# EAGLE board laserprojector (EAGLE 5.10)
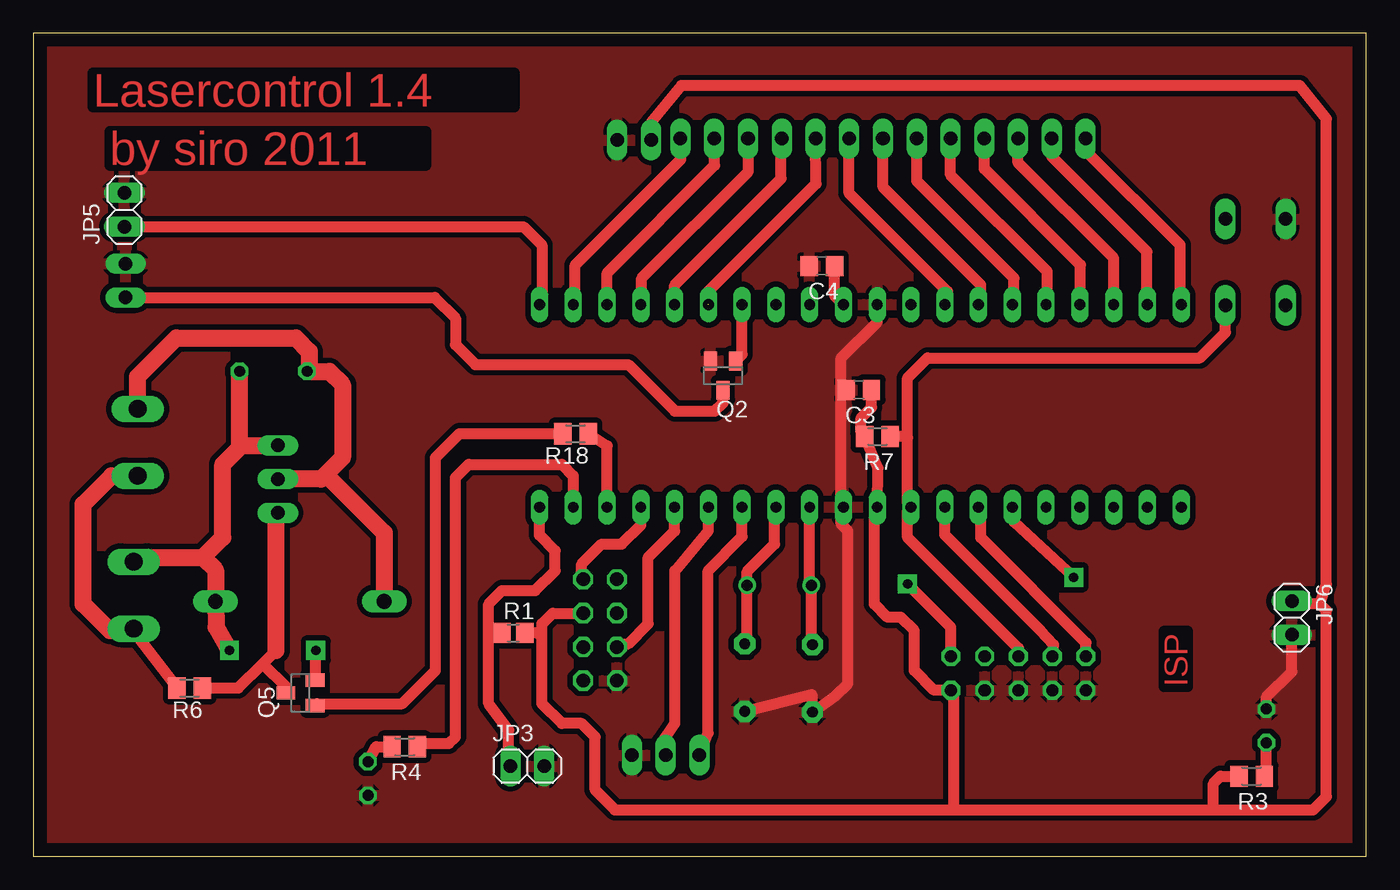
[diagram p0: board, top side]
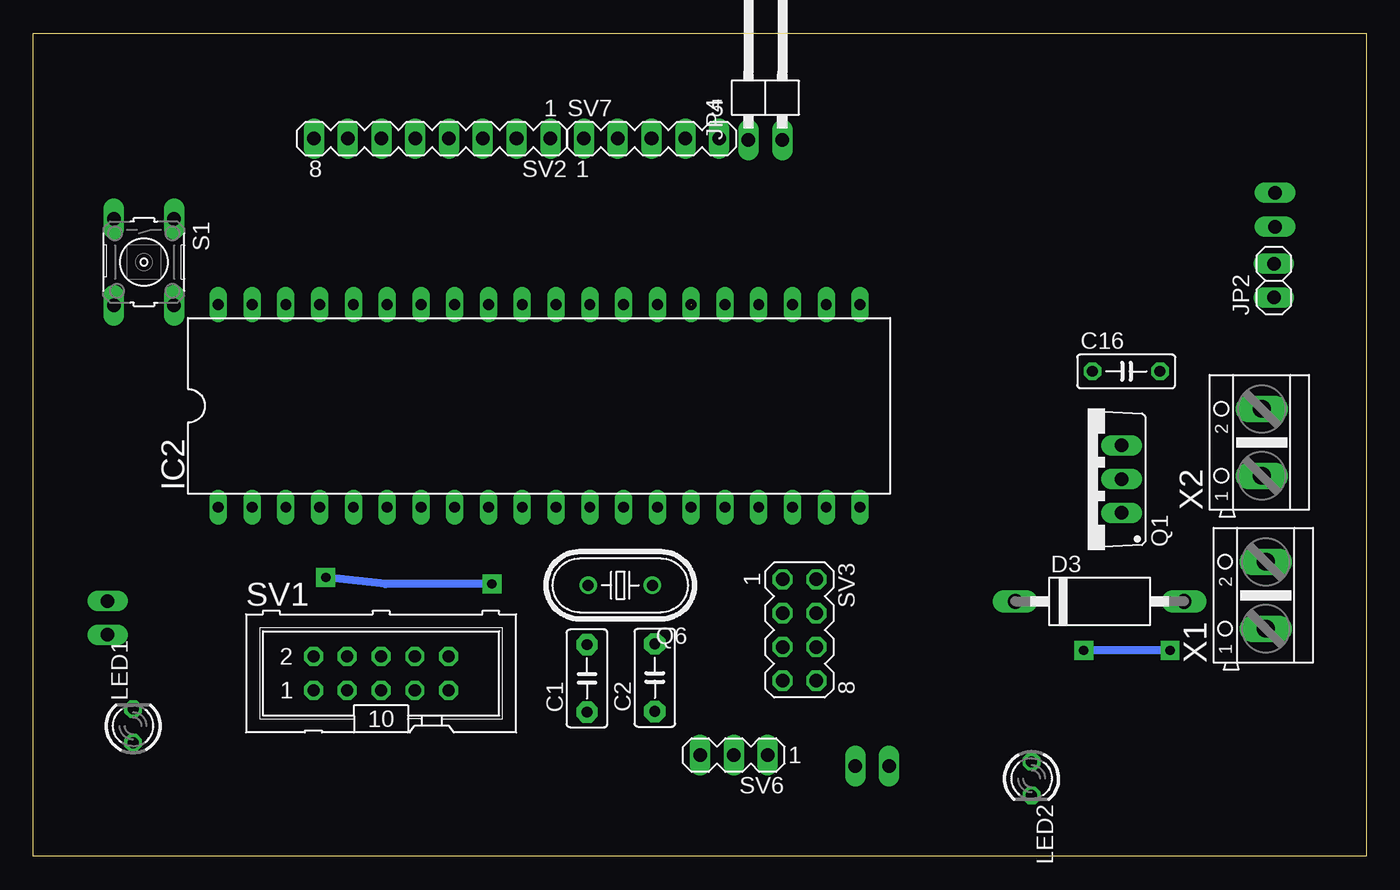
[diagram p1: board, bottom side, seen from below]

Size 100.25 x 61.93 mm. Coordinates in mm from the lower left corner, seen from the top.
Outline: 0,0 100.25,0 100.25,61.93 0,61.93 0,0
Copper layers (1*16): Top 0.035mm / dielectric 1.5mm / Bottom 0.035mm
Design rules "default *": minimum track width 10mil, minimum drill 24mil, track to track 8mil, track to pad 8mil, pad to pad 8mil, via to via 8mil, smd to smd 8mil, copper to edge 40mil, drill to drill 8mil, minimum pad ring 10mil, minimum via ring 8mil, stop-mask expansion 4mil, vias tented up to drill 0mil, thermal gap 10mil
Net classes: 0 default: clearance 0.254 mm

## Footprints (pad centres in the part's own frame; a part is rotated, then mirrored left to right if it is on the bottom)
C5B3 = drill 0.813 pad 1.6 octagon: 1 -2.54,0; 2 2.54,0
C0805 = smd 1.3 x 1.5: 1 -0.95,0; 2 0.95,0
C050-025X075 = drill 0.813 octagon: 1 -2.54,0; 2 2.54,0
DO15-12 = drill 1.118 long: A 6.35,0; C -6.35,0
DIL40 = drill 0.813 long: 1 -24.13,-7.62; 2 -21.59,-7.62; 3 -19.05,-7.62; 4 -16.51,-7.62; 5 -13.97,-7.62; 6 -11.43,-7.62; 7 -8.89,-7.62; 8 -6.35,-7.62; 9 -3.81,-7.62; 10 -1.27,-7.62; 11 1.27,-7.62; 12 3.81,-7.62; 13 6.35,-7.62; 14 8.89,-7.62; 15 11.43,-7.62; 16 13.97,-7.62; 17 16.51,-7.62; 18 19.05,-7.62; 19 21.59,-7.62; 20 24.13,-7.62; 21 24.13,7.62; 22 21.59,7.62; 23 19.05,7.62; 24 16.51,7.62; 25 13.97,7.62; 26 11.43,7.62; 27 8.89,7.62; 28 6.35,7.62; 29 3.81,7.62; 30 1.27,7.62; 31 -1.27,7.62; 32 -3.81,7.62; 33 -6.35,7.62; 34 -8.89,7.62; 35 -11.43,7.62; 36 -13.97,7.62; 37 -16.51,7.62; 38 -19.05,7.62; 39 -21.59,7.62; 40 -24.13,7.62
1X02 = drill 1.016 long: 1 -1.27,0; 2 1.27,0
1X02/90 = drill 1.016 long: 1 -1.27,-3.81; 2 1.27,-3.81
LED3MM = drill 0.813 octagon: A -1.27,0; K 1.27,0
TO220BV = drill 1.016 long: D 0,-2.54; G -2.54,-2.54; S 2.54,-2.54
SOT23 = smd 1 x 1.4: 1 -0.95,-1.1; 2 0.95,-1.1; 3 0,1.1
HC49U70 = drill 0.813 round: 1 -2.413,0; 2 2.413,0
R0805 = smd 1.3 x 1.5: 1 -0.85,0; 2 0.85,0
M0805 = smd 1.3 x 1.6: 1 -0.95,0; 2 0.95,0
B3F-10XX = drill 1.016 long: 1 -3.251,2.261; 2 3.251,2.261; 3 -3.251,-2.261; 4 3.251,-2.261
ML10 = drill 0.914 octagon: 1 -5.08,-1.27; 2 -5.08,1.27; 3 -2.54,-1.27; 4 -2.54,1.27; 5 0,-1.27; 6 0,1.27; 7 2.54,-1.27; 8 2.54,1.27; 9 5.08,-1.27; 10 5.08,1.27
MA08-1 = drill 1.016 long: 1 -8.89,0; 2 -6.35,0; 3 -3.81,0; 4 -1.27,0; 5 1.27,0; 6 3.81,0; 7 6.35,0; 8 8.89,0
MA04-2 = drill 1.016 octagon: 1 -3.81,-1.27; 2 -3.81,1.27; 3 -1.27,-1.27; 4 -1.27,1.27; 5 1.27,-1.27; 6 1.27,1.27; 7 3.81,-1.27; 8 3.81,1.27
MA03-1 = drill 1.016 long: 1 -2.54,0; 2 0,0; 3 2.54,0
MA05-1 = drill 1.016 long: 1 -5.08,0; 2 -2.54,0; 3 0,0; 4 2.54,0; 5 5.08,0
AK500/2 = drill 1.321 long: 1 -2.515,0; 2 2.515,0

## Placement (x,y rotation side)
C1  22n  [C5B3]  58.6,13.4 90 bottom
C2  22n  [C5B3]  53.5,13.45 90 bottom
C3  100n  [C0805]  62.1,35.1 180 top
C4  100n  [C0805]  59.32,44.42 180 top
C16  100n  [C050-025X075]  18.05,36.5 0 bottom
D3  1N5060GP  [DO15-12]  20.05,19.19 0 bottom
IC2  ATMEGA32L  [DIL40]  62.2,33.9 0 bottom
JP2  to lasercontrol  [1X02]  6.95,43.33 90 bottom
JP3  POWERON BUTTON  [1X02]  37.15,6.8 0 top
JP4  LCD Power  [1X02/90]  45.19,57.71 0 bottom
JP5  [1X02]  6.85,48.65 90 top
JP6  [1X02]  94.65,17.95 270 top
LED1  Status  [LED3MM]  92.74,9.83 90 bottom
LED2  Blink  [LED3MM]  25.17,5.86 270 bottom
Q1  BUZ11BV  [TO220BV]  20.93,28.38 90 bottom
Q2  BSS123  [SOT23]  51.88,36.17 180 top
Q5  BSS123  [SOT23]  20.1,12.31 90 top
Q6  8M  [HC49U70]  56.1,20.4 180 bottom
R1  10k  [R0805]  36.11,16.81 0 top
R3  330  [M0805]  91.63,6.04 180 top
R4  330  [M0805]  27.94,8.26 180 top
R6  500  [M0805]  11.76,12.68 180 top
R7  10k  [M0805]  63.49,31.6 180 top
R18  100  [M0805]  40.79,31.8 180 top
S1  [B3F-10XX]  91.93,44.71 270 bottom
SV1  ISP  [ML10]  74.1,13.77 0 bottom
SV2  LCD Data  [MA08-1]  70.25,54 180 bottom
SV3  Keyboard  [MA04-2]  42.63,17.03 270 bottom
SV6  USART  [MA03-1]  47.56,7.63 180 bottom
SV7  LCD Control  [MA05-1]  53.75,54 0 bottom
X1  [AK500/2]  7.55,19.65 90 bottom
X2  [AK500/2]  7.85,31.15 90 bottom

## Library data of the parts
C1 C2 = capacitor-wima
C3 C4 C16 R3 R4 R7 = rcl
D3 = diode
IC2 = atmel; MPN: ATMEGA32-16PU; OC_FARNELL: 1661729; OC_NEWARK: 51P1794
JP2-JP6 = pinhead
LED1 LED2 = led
Q1 = transistor-power
Q2 Q5 = transistor-small-signal
Q6 = crystal; OC_FARNELL: unknown; OC_NEWARK: unknown
R1 R6 R18 = resistor
S1 = switch-omron
SV1 = con-harting-ml
SV2 SV3 SV6 SV7 = con-lstb
X1 X2 = con-ptr500; OC_FARNELL: unknown; OC_NEWARK: unknown

## Nets
GND: C1.1 C2.1 C3.2 C4.2 IC2.11 IC2.31 JP2.2 JP3.2 JP4.2 JP5.2 JP6.2 LED1.K LED2.K Q2.2 S1.3 SV1.1 SV1.3 SV1.5 SV1.7 SV3.7 SV6.1
HMOTORPWM: IC2.21 JP5.1
N$1: IC2.19 R4.1
N$2: C1.2 IC2.12 Q6.2
N$3: IC2.33 SV2.1
N$4: IC2.34 SV2.2
N$5: IC2.35 SV2.3
N$6: IC2.36 SV2.4
N$7: IC2.37 SV2.5
N$8: IC2.38 SV2.6
N$9: IC2.39 SV2.7
N$10: IC2.40 SV2.8
N$11: IC2.17 SV3.2
N$12: IC2.16 SV3.5
N$13: C2.2 IC2.13 Q6.1
N$14: IC2.22 SV7.5
N$15: IC2.20 JP3.1 R1.1
N$16: IC2.9 R7.1 S1.2 SV1.6
N$17: LED1.A R3.1
N$19: LED2.A R4.2
N$21: IC2.14 SV6.3
N$22: IC2.23 SV7.4
N$23: IC2.24 SV7.3
N$24: IC2.25 SV7.2
N$25: IC2.26 SV7.1
N$27: Q1.G Q5.3 R6.1
N$28: Q5.1 R18.2
N$29: IC2.8 SV1.4
N$30: R6.2 X1.1 X2.1
N$31: IC2.15 SV6.2
N$32: C4.1 IC2.30
N$33: C16.2 D3.A Q1.S Q5.2 X1.2
N$34: JP2.1 Q2.3
N$36: IC2.27 Q2.1
N$45: IC2.6 SV1.10
N$48: IC2.7 SV1.2
N$53: C16.1 D3.C Q1.D X2.2
VDD: C3.1 IC2.10 JP4.1 JP6.1 R1.2 R3.2 R7.2 SV1.9 SV3.4
VMOTORPWM: IC2.18 R18.1

## Tracks (layer width: path | path; a pad name or v marks a point on that pad's centre or on a via)
GND
  Top 0.813: C2.1 58.55,12.18 C1.1 60.38,12.13 61.25,13 61.25,24.5 60.75,25 60.75,26.1 IC2.11 60.75,26.46 60.75,35 | IC2.31 63.47,40.22 60.75,37.5 60.75,35 | C3.2 60.85,35.1 60.75,35 | JP6.2 94.65,13.9 92.75,12 LED1.K
  pour Top (isolate 0.406): 100.25,62 -0.25,62 -0.25,0 100.25,0
HMOTORPWM
  Top 0.813: JP5.1 36.87,47.38 38.25,46 38.25,41.7 IC2.21
N$1
  Top 0.813: IC2.19 40.61,28.64 39.75,29.5 32.75,29.5 31.75,28.5 31.75,9 31.25,8.5 29.13,8.5 R4.1
N$2
  Top 0.813: IC2.12 58.39,20.52 Q6.2 58.52,16.76 C1.2
N$3
  Top 0.813: SV2.1 61.36,49.89 68.75,42.5 68.75,41.72 IC2.33
N$4
  Top 0.813: SV2.2 63.9,50.35 71.25,43 71.25,41.68 IC2.34
N$5
  Top 0.813: SV2.3 66.44,50.81 73.75,43.5 73.75,41.64 IC2.35
N$6
  Top 0.813: SV2.4 68.98,51.27 76.25,44 76.25,41.6 IC2.36
N$7
  Top 0.813: SV2.5 71.52,51.73 78.75,44.5 78.75,41.56 IC2.37
N$8
  Top 0.813: SV2.6 74.06,52.19 81.25,45 IC2.38
N$9
  Top 0.813: SV2.7 76.6,52.65 83.75,45.5 83.75,41.56 IC2.39
N$10
  Top 0.813: SV2.8 79.14,53.11 86.25,46 86.25,41.6 IC2.40
N$11
  Top 0.813: IC2.17 45.69,24.94 44.25,23.5 42.75,23.5 41.25,22 41.25,20.95 SV3.2
N$12
  Top 0.813: IC2.16 48.23,24.48 46.25,22.5 46.25,17.5 44.75,16 44.13,16 SV3.5
N$13
  Top 0.813: IC2.13 55.75,26.18 55.75,23.5 53.69,21.44 Q6.1 53.69,16.41 C2.2
N$14
  Top 0.813: SV7.5 48.71,52.45 40.75,44.5 40.75,41.66 IC2.22
N$15
  Top 0.813: 34.25,17 34.25,11.5 35.75,9.5 35.75,6.43 JP3.1 | R1.1 34.44,16.81 34.25,17 | IC2.20 38.07,24.18 39.25,23 39.25,21.5 37.75,20 35.25,20 34.25,19 34.25,17
N$16
  Top 0.813: SV1.6 74.1,15.66 65.75,24 65.75,26.02 IC2.9 65.75,26.54 65.75,31.5 | 65.75,31.5 65.75,36 67.25,37.5 87.75,37.5 89.67,39.42 S1.2 | R7.1 65.66,31.6 65.75,31.5
N$17
  Top 0.813: LED1.A 92.74,6.2 R3.1
N$19
  Top 0.813: R4.2 25.8,8.26 LED2.A
N$21
  Top 0.813: IC2.14 53.31,24.06 50.75,21.5 50.75,9.28 SV6.3
N$22
  Top 0.813: IC2.23 43.15,43.9 51.25,52 51.25,53.89 SV7.4
N$23
  Top 0.813: SV7.3 53.79,51.53 45.75,43.5 45.75,41.58 IC2.24
N$24
  Top 0.813: IC2.25 48.23,42.98 56.25,51 56.25,53.82 SV7.2
N$25  (1 unrouted)
  Top 0.813: SV7.1 58.87,50.61 50.75,42.5 50.75,41.5
N$27
  Top 0.813: R6.1 15.43,12.68 17.25,14.5 | 17.25,14.5 18.25,15.5 | Q5.3 19,12.75 17.25,14.5
  Top 1.27: 18.25,15.5 18.25,25.7 Q1.G
N$28
  Top 0.813: R18.2 32.06,31.8 30.25,30 30.25,14 27.75,11.5 21.34,11.5 Q5.1
N$29
  Top 0.813: IC2.8 68.55,24.2 75.75,17 76.75,15.92 SV1.4
N$30
  Top 0.813: 7.55,16.94 R6.2
  Top 1.27: X2.1 5.89,28.63 3.75,26.5 3.75,19 5.75,17 7.42,17 X1.1 7.55,16.94
N$31
  Top 0.813: IC2.15 50.77,24.52 48.25,21.5 48.25,10 47.25,8.5 47.25,7.43 SV6.2
N$32
  Top 0.813: C4.1 60.27,42.19 IC2.30
N$33  (via drill 0.7 pad 1.42)
  Top 0.813: Q5.2 21.2,15.45 v21.25,15.5
  Top 1.27: 15.68,30.92 Q1.S | 15.68,30.92 14.25,29.5 14.25,24 12.75,22.5 | 12.75,22.5 7.89,22.5 X1.2 | 12.75,22.5 13.7,21.55 D3.A 13.75,17.24 v14.75,15.5 | C16.2 15.51,31.09 15.68,30.92
  Bottom 0.61: v14.75,15.5 v21.25,15.5
N$34
  Top 0.813: Q2.3 51.88,34.12 51.25,33.5 48.25,33.5 44.75,37 33.25,37 31.75,38.5 31.75,40.5 30.2,42.06 JP2.1
N$36
  Top 0.813: IC2.27 53.31,37.76 Q2.1
N$45  (via drill 0.7 pad 1.42)
  Top 0.813: SV1.10 69.02,17.24 v65.75,20.5 | v78.25,21 73.75,25.16 IC2.6
  Bottom 0.61: v65.75,20.5 73.75,20.5 v78.25,21
N$48
  Top 0.813: SV1.2 79.18,16.08 71.25,24 71.25,26.12 IC2.7
N$53
  Top 1.27: Q1.D 21.64,28.38 22,28.75 | 22,28.75 23.25,30 23.25,35.5 22.25,36.5 C16.1 20.75,36.66 20.75,38 19.75,39 10.75,39 7.85,36.1 X2.2 | D3.C 26.4,24.35 22,28.75
VDD
  Top 0.813: C3.1 63.05,33.79 62.25,33 62.25,31.88 R7.2 63.54,29.21 IC2.10 63.25,26.06 63.25,19 64.25,18 65.25,18 66.25,17 66.25,14 67.75,12.5 68.01,12.5 SV1.9 69.25,12.26 69.25,3.5 | 96.75,19 94.87,19 JP6.1 | JP4.1 46.46,55.21 48.75,58 95.25,58 97.25,55.5 97.25,20.5 96.75,19 | SV3.4 39.06,18.3 38.25,17.5 38.25,16.5 | 38.25,16.5 38.25,11.5 39.75,10 41.25,10 42.25,9 42.25,5 43.75,3.5 69.25,3.5 | R1.2 37.94,16.81 38.25,16.5 | 96.75,19 97.25,18.5 97.25,4.5 96.25,3.5 88.75,3.5 | R3.2 89.29,6.04 88.75,5.5 88.75,3.5 | 69.25,3.5 88.75,3.5
VMOTORPWM
  Top 0.813: IC2.18 43.15,30.89 R18.1

## Text on the board
Top: Lasercontrol 1.4 | by siro 2011 | ISP